# EAGLE board BOARD (EAGLE 8.6.3)
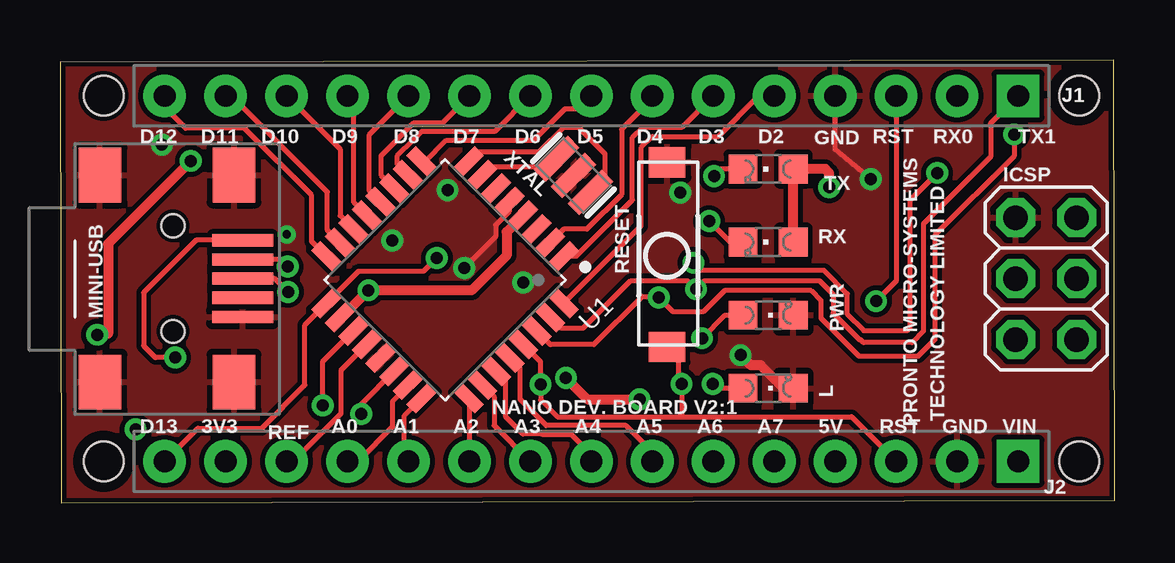
[diagram p0: board, top side]
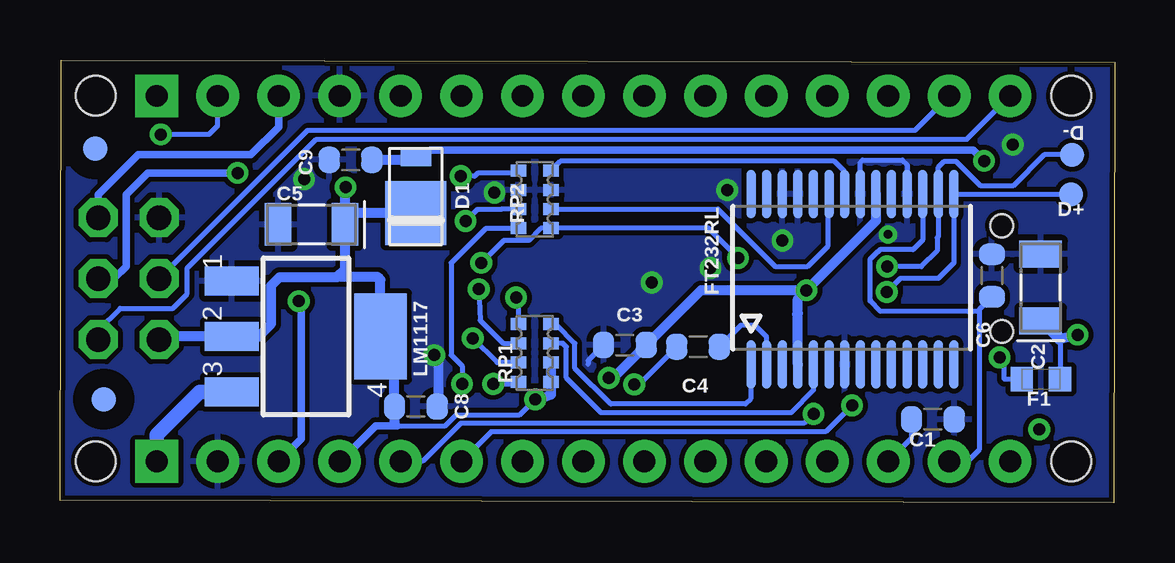
[diagram p1: board, bottom side, seen from below]

Size 43.95 x 18.46 mm. Coordinates in mm from the lower left corner, seen from the top.
Outline: 0.05,0 43.95,0.1 43.9,18.46 0,18.36 0.05,0
Copper layers (1*16): Top 0.035mm / dielectric 1.5mm / Bottom 0.035mm
Design rules "default *": minimum track width 6mil, minimum drill 0.35mm, track to track 6mil, track to pad 6mil, pad to pad 6mil, via to via 6mil, smd to smd 6mil, copper to edge 8mil, drill to drill 8mil, minimum pad ring 12mil, minimum via ring 8mil, stop-mask expansion 0mil, vias tented up to drill 24mil, thermal gap 10mil
Holes 1.65 mm at 1.82,1.72 42.46,16.96 42.46,1.72 1.82,16.96

## Footprints (pad centres in the part's own frame; a part is rotated, then mirrored left to right if it is on the bottom)
C0603-ROUND = smd 0.898 x 1.1: 1 -0.889,0; 2 0.889,0
TAN-A = smd 1.118 x 1.778: 1 0,0; 2 2.794,0
DO220AAL = smd 2.667 x 2.54: P$1 -0.7,0 | smd 0.762 x 1.27: P$2 1.65,0
TP-1.00MM = smd 1 x 1 bottom: X 0,0
0603-1608X90N = smd 0.95 x 1: 1 -0.8,0; 2 0.8,0
SSOP28 = smd 0.381 x 2.032: 1 0,0; 2 0.65,0; 3 1.3,0; 4 1.95,0; 5 2.6,0; 6 3.25,0; 7 3.9,0; 8 4.55,0; 9 5.2,0; 10 5.85,0; 11 6.5,0; 12 7.15,0; 13 7.8,0; 14 8.45,0; 15 8.45,7.112; 16 7.8,7.112; 17 7.15,7.112; 18 6.5,7.112; 19 5.85,7.112; 20 5.2,7.112; 21 4.55,7.112; 22 3.9,7.112; 23 3.25,7.112; 24 2.6,7.112; 25 1.95,7.112; 26 1.3,7.112; 27 0.65,7.112; 28 0,7.112
2X03 = drill 1.016 pad 1.55 octagon: 1 -2.54,-1.27; 2 -2.54,1.27; 3 0,-1.27; 4 0,1.27; 5 2.54,-1.27; 6 2.54,1.27
HEAD15-NOSS = drill 0.914 pad 1.778 square: 1 0,0 | drill 0.914 pad 1.778: 2 2.54,0; 3 5.08,0; 4 7.62,0; 5 10.16,0; 6 12.7,0; 7 15.24,0; 8 17.78,0; 9 20.32,0; 10 22.86,0; 11 25.4,0; 12 27.94,0; 13 30.48,0; 14 33.02,0; 15 35.56,0
CHIPLED_0805 = smd 1.2 x 1.2: A 0,-1.05; C 0,1.05
LINEAR_SOT223 = smd 1.219 x 2.235: 1 -2.311,-3.099; 2 0,-3.099; 3 2.311,-3.099 | smd 3.6 x 2.2: 4 0,3.099
USB-MINI-B_2 = smd 0.508 x 2.54: 1 0,0; 2 0.8,0; 3 1.6,0; 4 2.4,0; 5 3.2,0 | smd 2.286 x 1.778: 6 -2.717,5.948; 7 -2.717,0.36; 8 5.918,0.36; 9 5.918,5.948 | hole 0.95: -0.6,2.9; 3.8,2.9
FD-1-1.5 = smd 1.016 x 1.016: P$1 0,0
CAY16 = smd 0.5 x 0.65: 1 -1.2,-0.675; 2 -0.4,-0.675; 3 0.4,-0.675; 4 1.2,-0.675; 5 1.2,0.675; 6 0.4,0.675; 7 -0.4,0.675; 8 -1.2,0.675
QFP80P900X900X120-32N = smd 1.27 x 0.55: 1 -4.18,2.8; 2 -4.18,2; 3 -4.18,1.2; 4 -4.18,0.4; 5 -4.18,-0.4; 6 -4.18,-1.2; 7 -4.18,-2; 8 -4.18,-2.8; 17 4.18,-2.8; 18 4.18,-2; 19 4.18,-1.2; 20 4.18,-0.4; 21 4.18,0.4; 22 4.18,1.2; 23 4.18,2; 24 4.18,2.8 | smd 0.55 x 1.27: 9 -2.8,-4.18; 10 -2,-4.18; 11 -1.2,-4.18; 12 -0.4,-4.18; 13 0.4,-4.18; 14 1.2,-4.18; 15 2,-4.18; 16 2.8,-4.18; 25 2.8,4.18; 26 2,4.18; 27 1.2,4.18; 28 0.4,4.18; 29 -0.4,4.18; 30 -1.2,4.18; 31 -2,4.18; 32 -2.8,4.18
3*6*4.3_PUSH_SWITCH = smd 1.27 x 1.524: P$1 -3.889,0; P$2 3.81,0
RESONATOR = smd 0.7 x 2: 1 -1,0; 2 0,0; 3 1,0

## Placement (x,y rotation side)
C1  100nF  [C0603-ROUND]  7.58,3.47 0 bottom
C2  4,7uF_16V  [TAN-A]  3.09,7.57 90 bottom
C3  1uF  [C0603-ROUND]  20.41,6.57 180 bottom
C4  100nF  [C0603-ROUND]  17.36,6.5 0 bottom
C5  4,7uF_16V  [TAN-A]  32.07,11.6 180 bottom
C6  100nF  [C0603-ROUND]  5.12,9.47 270 bottom
C8  1uF  [C0603-ROUND]  29.12,4.01 0 bottom
C9  100nF  [C0603-ROUND]  31.84,14.29 180 bottom
D1  SS1P3L  [DO220AAL]  29.12,12.77 90 bottom
D+  DNP  [TP-1.00MM]  1.83,12.86 0 top
D-  DNP  [TP-1.00MM]  1.78,14.5 0 top
F1  MFFSMF050  [0603-1608X90N]  3.08,5.15 180 bottom
FT232RL  FT232RL  [SSOP28]  15.16,5.76 0 bottom
ICSP  [2X03]  41.09,9.34 90 top
J1  XXXX_STRIPNANO  [HEAD15-NOSS]  39.92,16.96 180 top
J2  XXXX_STRIPNANO  [HEAD15-NOSS]  39.92,1.72 180 top
L  Yellow  [CHIPLED_0805]  29.51,4.77 270 top
LM1117  LM1117  [LINEAR_SOT223]  33.7,6.93 270 bottom
MINI-USB  [USB-MINI-B_2]  7.61,7.74 90 top
P0INT_2  DNP  [FD-1-1.5]  42.48,14.75 0 bottom
POINT_1  DNP  [FD-1-1.5]  42.13,4.31 90 bottom
POINT_A  DNP  [FD-1-1.5]  42.43,17 0 top
POINT_B  DNP  [FD-1-1.5]  1.82,1.71 270 top
PWR  Green  [CHIPLED_0805]  29.51,7.82 270 top
RP1  1K  [CAY16]  24.17,6.24 270 bottom
RP2  1K  [CAY16]  24.17,12.64 90 bottom
RX  Red  [CHIPLED_0805]  29.51,10.86 90 top
TX  Green  [CHIPLED_0805]  29.51,13.91 90 top
U1  ATMEGA328PB-U  [QFP80P900X900X120-32N]  16.04,9.29 225 top
U$4  3*6*4.2H260g  [3*6*4.3_PUSH_SWITCH]  25.3,10.3 270 top
XTAL  16MHz  [RESONATOR]  21.4,13.64 135 top

## Library data of the parts
C1 C4 C6 C9 = Condensatori; CASE: 0603; MONTHLY_USAGE: _____; PART_NUMBER: cl10b104kbnc; PRICE: _____; SUPPLIER: _____; TYPE: Condensatori
C2 C5 = Condensatori; CASE: Case_A_(1206); MONTHLY_USAGE: _____; PART_NUMBER: TAJA475MO16RNJ; PRICE: _____; SUPPLIER: _____; TYPE: Condensatori
C3 C8 = Condensatori; CASE: 0603; MONTHLY_USAGE: _____; PART_NUMBER: 1uF_0603/GRM188R61E105KA12D; PRICE: _____; SUPPLIER: _____; TYPE: Condensatori
D1 = Diodi; CASE: SMP; MONTHLY_USAGE: _____; PART_NUMBER: SS1P3L-M3/84A; PRICE: _____; SUPPLIER: _____; TYPE: Diodi
D+ D- P0INT_2 POINT_1 POINT_A POINT_B = Arduino-utility; DATASHEET: DNP; DISTRIBUTOR-LINK: DNP; DISTRIBUTOR-PN: DNP; MANUFACTURER: DNP; MANUFACTURER-PN: DNP
F1 = Arduino-rcl; DATASHEET: http://www.bourns.com/docs/Product-Datasheets/mffsmf.pdf; DISTRIBUTOR-LINK: http://www.digikey.com/product-detail/en/bourns-inc/MF-FSMF050X-2/MF-FSMF050X-2CT-ND/2039389; DISTRIBUTOR-PN: MF-FSMF050X-2CT-ND; MANUFACTURER: Bourns Inc; MANUFACTURER-PN: MF-FSMF050X-2
FT232RL = IntegratedCircuits; CASE: SSOP28; MONTHLY_USAGE: _____; PART_NUMBER: FT232RL; PRICE: _____; SUPPLIER: _____; TYPE: Circuito_Integrato
ICSP = Connettori; MONTHLY_USAGE: _____; PART_NUMBER: PH254-203DF118A00V; PRICE: _____; SUPPLIER: _____; TYPE: Connettori
J1 J2 = Connettori
L = Opto; MONTHLY_USAGE: _____; PART_NUMBER: KPT-2012YC; PRICE: _____; SUPPLIER: _____; TYPE: Opto
LM1117 = IntegratedCircuits; CASE: SOT223; MONTHLY_USAGE: _____; PART_NUMBER: LM1117IMPX-5.0; PRICE: _____; SUPPLIER: _____; TYPE: Circuito_Integrato
MINI-USB = Connettori; MONTHLY_USAGE: _____; PART_NUMBER: 14850; PRICE: _____; SUPPLIER: _____; TYPE: Connettori
PWR TX = Opto; MONTHLY_USAGE: _____; PART_NUMBER: KPT-2012SGC; PRICE: _____; SUPPLIER: _____; TYPE: Opto
RP1 RP2 = Resistenze; CASE: SMD_3,2x1,6; MONTHLY_USAGE: _____; PART_NUMBER: 064R_1K_/_CAY16-102J4LF; PRICE: _____; SUPPLIER: _____; TYPE: Resistenze
RX = Opto; MONTHLY_USAGE: _____; PART_NUMBER: KTP-2012SURCK; PRICE: _____; SUPPLIER: _____; TYPE: Opto
U1 = ATMEGA328PB-U; AVAILABILITY: In Stock; DESCRIPTION: AVR AVR® ATmega, Functional Safety (FuSa) Microcontroller IC 8-Bit 20MHz 32KB (16K x 16) FLASH 32-TQFP (7x7); MF: Microchip Technology; MP: ATMEGA328PB-U; PACKAGE: TQFP-32 Microchip; PRICE: None; PURCHASE-URL: https://www.amazon.ae/Conditioner-Parts-ATMEGA328PB-AU-ATMEGA328PB-U-microcontroller/dp/B094R2HX55
U$4 = 364.3H260g push switch
XTAL = Cristalli; MONTHLY_USAGE: _____; PART_NUMBER: CSTCE16M0V53-R0; PRICE: _____; SUPPLIER: _____; TYPE: Cristalli

## Nets
3V3: C6.2 FT232RL.17 J2.14
+5V: C3.1 C5.1 C8.1 D1.P$1 FT232RL.4 FT232RL.20 ICSP.2 J2.4 LM1117.2 LM1117.4 RP1.5 RP1.6 RX.A TX.A U1.4 U1.18
A0: J2.12 U1.23
A1: J2.11 U1.24
A2: J2.10 U1.25
A3: J2.9 U1.26
A4: J2.8 U1.27
A5: J2.7 U1.28
A6/PE2: J2.6 U1.19
A7/PE3: J2.5 U1.22
AREF: C1.1 J2.13 U1.20
COM: C1.2 C2.2 C3.2 C5.2 C6.1 C8.2 C9.2 FT232RL.7 FT232RL.18 FT232RL.21 FT232RL.25 FT232RL.26 ICSP.6 J1.4 J2.2 L.C LM1117.1 MINI-USB.1 MINI-USB.6 MINI-USB.7 MINI-USB.8 MINI-USB.9 PWR.C RP2.3 RP2.6 U1.5 U1.21 U$4.P$1 XTAL.2
D0/RX: J1.2 RP1.1 U1.30
D1/TX: J1.1 RP1.2 U1.31
D2: J1.5 U1.32
D3: J1.6 U1.1
D4: J1.7 U1.2
D5: J1.8 U1.9
D6: J1.9 U1.10
D7: J1.10 U1.11
D8: J1.11 U1.12
D9: J1.12 U1.13
D10: J1.13 U1.14
D11/MOSI: ICSP.4 J1.14 U1.15
D12/MISO: ICSP.1 J1.15 U1.16
D13/SCK: ICSP.3 J2.15 RP2.1 U1.17
N$1: U1.7 XTAL.3
N$2: U1.8 XTAL.1
N$3: PWR.A RP1.3
N$4: C4.2 FT232RL.2
N$5: D+.X FT232RL.15 MINI-USB.3
N$6: D-.X FT232RL.16 MINI-USB.4
N$7: L.A RP2.8
N$8: FT232RL.23 RP2.2
N$9: FT232RL.22 RP2.4
N$11: RP2.5 TX.C
N$26: F1.2 MINI-USB.5
N$29: RP2.7 RX.C
PE0: U1.3
PE1: U1.6
RESET: C4.1 ICSP.5 J1.3 J2.3 RP1.4 U1.29 U$4.P$2
RX: FT232RL.1 RP1.8
TX: FT232RL.5 RP1.7
VIN: J2.1 LM1117.3
VUSB: C2.1 C9.1 D1.P$2 F1.1

## Tracks (layer width: path | path; a pad name or v marks a point on that pad's centre or on a via)
3V3
  Bottom 0.203: C6.2 5.65,8.05 | J2.14 6.13,1.72 5.65,2.2 5.65,8.05 | FT232RL.17 8.01,10.94 8.4,10.55 9.78,10.55 9.88,10.45 9.9,10.45 10.21,10.14 10.21,8.49 10.2,8.48 10.2,8.4 9.8,8 5.7,8 5.65,8.05
+5V  (via drill 0.5)
  Top 0.406: v32.05,13.15 32.05,13.75 31.89,13.91 TX.A RX.A | U1.18 11.75,7.75 v12.85,8.85 17.15,8.85 18.61,10.31 18.61,11.29 U1.4 | v21.08,5.2 21.98,4.31 v24.15,4.31
  Bottom 0.203: 32.27,1.72 J2.4 | 29.89,3.2 27.89,3.2 27.43,3.66 24.8,3.66 24.28,4.18
  Bottom 0.305: 32.27,1.72 30.79,3.2 29.89,3.2 30.01,3.32
  Bottom 0.406: 30.01,3.32 C8.1 30.01,6.34 LM1117.4 30.6,9.3 30.7,9.4 32.4,9.4 | D1.P$1 31.6,12.07 C5.1 | C5.1 32.07,13.13 v32.05,13.15 | FT232RL.20 9.96,11.74 v12.85,8.85 | FT232RL.4 13.21,7.9 | 13.21,7.9 13.21,8.49 v12.85,8.85 | v12.85,8.85 17.25,8.85 C3.1 20.89,5.2 v21.08,5.2 | 32.4,9.4 34.8,9.4 35.15,9.05 35.15,7.45 35.67,6.93 LM1117.2 39.69,6.93 ICSP.2 | C5.1 32.07,9.73 32.4,9.4 | v24.15,4.31 24.28,4.18 23.5,4.5 RP1.5 RP1.6 | 13.25,7.86 13.21,7.9
A0
  Top 0.203: U1.23 14.5,4.85 13.85,4.2 13.85,3.15 12.42,1.72 J2.12
A1
  Top 0.203: J2.11 14.35,1.89 14.35,3.64 U1.24
A2
  Top 0.203: U1.25 17.06,4.31 J2.10
A3
  Top 0.203: J2.9 19.58,1.72 18.09,3.21 18.09,4.42 U1.26
A4
  Top 0.203: J2.8 22.14,2.01 21.3,2.85 20.09,2.85 20.07,2.86 19.29,2.86 18.57,3.58 18.57,5.07 U1.27
A5
  Top 0.203: J2.7 24.68,2.12 23.58,3.22 20.26,3.22 19.17,4.3 19.17,5.6 U1.28
A6/PE2  (via drill 0.5)
  Top 0.203: v10.95,4.05 10.95,5.89 U1.19
  Bottom 0.203: J2.6 25.99,2.95 12.05,2.95 v10.95,4.05
A7/PE3  (via drill 0.5)
  Top 0.203: U1.22 12.55,4.1 v12.55,3.7
  Bottom 0.203: J2.5 28.84,1.72 27.25,3.31 12.94,3.31 v12.55,3.7
AREF
  Top 0.203: U1.20 11.7,5.51 11.7,3.7 9.72,1.72 J2.13
  Bottom 0.203: C1.1 8.47,2.69 J2.13
COM  (via drill 0.35, 0.5)
  Top 0.203: v33.78,13.49 32.3,14.72 J1.4 | 21.35,13.53 21.35,13.59 XTAL.2 | U1.5 18.72,12.14 18.15,11.58 18.15,11.09 v16.85,9.78
  Top 0.406: v28.36,6.15 28.78,5.72 29.2,5.72 30.16,4.77 L.C
  Bottom 0.203: RP2.6 25.04,12.85 | C3.2 21.95,5.93 21.95,5.78 | FT232RL.18 8.66,14.09 8.85,14.29 10.51,14.29 10.61,14.19 FT232RL.21
  Bottom 0.406: v28.36,6.15 28.31,6.1 28.2,6.1 28.2,4.04 C8.2
  other vias: 19.3,9.18 9.45,11.18 13.85,10.93 4.25,14.93 25.85,12.93 16.15,13.03
  pour Top (isolate 0.203): -0.05,18.4 45.1,18.4 45.1,0 0,0 -0.05,0
  pour Bottom (isolate 0.203): -0.05,18.4 45.05,18.4 45.05,0.05 -0.05,0.05
D0/RX  (via drill 0.5)
  Top 0.203: U1.30 20.44,6.59 22.24,6.59 24.25,8.6 24.9,8.6 v24.95,8.55 25.55,7.95 26.8,7.95 27.69,8.84 31.29,8.84 31.71,8.43 31.71,7.69 33.29,6.11 35.76,6.11 36.45,6.8 36.45,11.15 39.75,14.45 v39.75,15.35
  Bottom 0.203: v24.95,8.55 24.85,8.45 RP1.1 | J1.2 37.38,15.72 37.75,15.35 v39.75,15.35
D1/TX  (via drill 0.5)
  Top 0.203: U1.31 20.89,7.28 21.8,7.28 23.78,9.26 26.14,9.26 v26.5,8.9 26.86,9.26 31.64,9.26 32.21,8.69 32.21,7.89 33.3,6.8 33.35,6.8 33.47,6.67 35.5,6.67 35.97,7.15 35.97,11.62 38.78,14.42 38.78,15.82 J1.1
  Bottom 0.203: v26.5,8.9 26.45,7.6 25.49,6.64 RP1.2
D2
  Top 0.203: J1.5 29.12,16.96 27.43,15.27 24.68,15.27 24.2,14.8 24.2,11.54 U1.32
D3
  Top 0.203: U1.1 21.49,10.26 23.85,12.62 23.85,15.23 24.28,15.66 25.92,15.66 J1.6
D4
  Top 0.203: J1.7 24.68,16.85 23.4,15.57 23.4,12.85 21.95,11.4 20.98,11.4 U1.2
D5
  Top 0.203: J1.8 21.61,16.43 21.05,16.43 19.75,15.12 17.17,15.12 17.15,15.11 16.1,15.11 15.22,14.22 U1.9
D6
  Top 0.203: J1.9 18.12,15.48 17.02,15.48 17,15.46 15.05,15.46 14.71,15.12 14.03,14.45 14.03,14.13 U1.10
D7
  Top 0.203: U1.11 13.37,13.66 13.37,14.46 14.73,15.82 15.92,15.82 J1.10
D8
  Top 0.203: U1.12 12.87,13.02 12.87,15.31 J1.11
D9
  Top 0.203: J1.12 11.98,16.93 12.25,16.66 12.25,12.52 U1.13
D10
  Top 0.203: U1.14 11.67,11.97 11.67,14.73 J1.13
D11/MOSI
  Top 0.203: U1.15 11.14,11.36 11.14,12.95 7.13,16.96 J1.14
  Bottom 0.203: ICSP.4 33.63,15.53 8.32,15.53 J1.14
D12/MISO
  Top 0.203: J1.15 4.36,16.49 5.24,15.61 5.25,15.62 7.7,15.62 7.7,15.6 10.49,12.81 10.49,10.89 U1.16
  Bottom 0.203: ICSP.1 42.36,7.19 41.45,8.1 39.25,8.1 38.65,8.7 38.65,9.77 33.27,15.15 6.17,15.15 J1.15
D13/SCK  (via drill 0.5)
  Top 0.203: v15.7,10.2 15.15,9.65 12.45,9.65 U1.17 10.2,7.41 10.2,4.9 8.4,3.1 5.74,3.1 J2.15 | v36.55,13.75 35.42,12.62 35.42,7.3 35.3,7.17 33.49,7.17 32.81,7.85 32.81,8.7 31.83,9.68 26.71,9.68 v26.39,10
  Bottom 0.203: v26.39,10 25.46,10.94 24.42,10.94 23.91,11.44 RP2.1 23.25,11.44 23.24,11.45 16.95,11.45 v15.7,10.2
  Bottom 0.305: ICSP.3 41.71,9.34 41.2,9.85 41.2,12.85 40.3,13.75 v36.55,13.75
N$1
  Top 0.203: XTAL.3 20.33,13.99 17.92,13.99 U1.7
N$2
  Top 0.203: U1.8 17.42,14.63 19.95,14.63 20.99,15.66 21.59,15.66 22.71,14.54 22.71,13.54 XTAL.1
N$3  (via drill 0.5)
  Top 0.203: v26.75,6.85 27.72,7.82 PWR.A
  Bottom 0.203: RP1.3 25.74,5.84 v26.75,6.85
N$4
  Bottom 0.203: FT232RL.2 14.51,6.9 15.01,7.4 15.57,7.4 C4.2
N$5  (via drill 0.5)
  Top 0.203: v9.5,8.78 8.94,9.34 MINI-USB.3
  Bottom 0.203: v9.5,8.78 8.93,9.35 7.35,9.35 6.71,9.99 FT232RL.15 1.98,12.87 1.91,12.94 D+.X
N$6  (via drill 0.5)
  Top 0.203: v9.49,9.84 9.19,10.14 MINI-USB.4
  Bottom 0.203: v9.49,9.84 8.06,9.84 7.4,10.5 7.4,11.05 7.35,11.09 FT232RL.16 7.35,13.98 7.1,14.24 6.62,14.24 6.53,14.14 6.52,14.14 5.61,13.23 4.22,13.23 2.94,14.5 D-.X
N$7  (via drill 0.5)
  Top 0.203: L.A 27.48,4.77 v27.2,4.95
  Bottom 0.2: 27.65,6.15 27.2,5.7 v27.2,4.95
  Bottom 0.203: RP2.8 26.2,11.44 27.65,9.99 27.65,6.15
N$8
  Bottom 0.203: FT232RL.23 11.91,12.8 11.95,12.75 11.95,10.7 12.8,9.85 14.15,9.85 16.54,12.24 RP2.2
N$9
  Bottom 0.203: RP2.4 23.1,14.24 11.7,14.24 11.26,13.79 FT232RL.22
N$11  (via drill 0.5)
  Top 0.203: v27.25,13.61 27.2,13.64 27.47,13.91 TX.C
  Bottom 0.203: RP2.5 24.96,13.73 26.55,13.73 26.67,13.61 v27.25,13.61
N$12  (via drill 0.5)
  other vias: 3.15,3.05
N$26  (via drill 0.5)
  Top 0.203: v4.8,6.05 3.97,6.05 3.49,6.54 3.49,8.75 5.67,10.94 MINI-USB.5
  Bottom 0.203: F1.2 4.6,5.15 4.6,5.85 v4.8,6.05
N$29  (via drill 0.5)
  Top 0.203: RX.C 27.92,10.86 v27.05,11.74
  Bottom 0.203: RP2.7 25.54,12.24 25.55,12.22 26.56,12.22 v27.05,11.74
RESET  (via drill 0.5)
  Top 0.2: U1.29 19.47,6.42
  Top 0.203: 25.8,3.57 20.73,3.57 20.02,4.28 v20.02,4.92 20.02,5.88 19.47,6.42 | 25.8,3.57 32.99,3.57 J2.3 | 25.75,6.68 25.75,6.45 | 25.75,6.45 25.75,4.95 25.9,4.8 | v25.9,4.95 25.9,4.8 | 25.9,4.8 25.9,3.67 25.8,3.57 | U$4.P$2 25.66,6.54 25.75,6.45 | v34,8.4 34.84,9.24 J1.3
  Bottom 0.2: C4.1 19.82,4.92 v20.02,4.92
  Bottom 0.203: 42.35,12.85 42.36,12.84 | v25.9,4.95 25.87,4.92 24.97,4.92 RP1.4
  Bottom 0.305: J2.3 33.9,2.66 33.9,8.3 v34,8.4 | J1.3 34.84,15.66 35.99,14.51 40.69,14.51 42.35,12.85 | 42.36,12.84 ICSP.5
RX
  Bottom 0.203: RP1.8 23.46,7.4 23.26,7.4 22.5,6.64 22.5,5.6 21,4.11 15.39,4.11 15.16,4.34 FT232RL.1
TX
  Bottom 0.203: RP1.7 23,6.64 22.85,6.5 22.85,5.2 21.4,3.75 13.5,3.75 12.56,4.7 FT232RL.5
VIN
  Bottom 0.61: LM1117.3 38.13,4.62 39.92,2.83 J2.1
VUSB  (via drill 0.5)
  Top 0.406: v1.55,7 2,7.05 2,10.8 v5.45,14.25
  Bottom 0.203: C2.1 2.28,6.76 F1.1
  Bottom 0.305: 28.8,14.42 28.52,14.7 23.2,14.7 19.95,14.7 5.9,14.7 v5.45,14.25
  Bottom 0.406: D1.P$2 28.8,14.42 28.93,14.29 C9.1 | v1.55,7 2.32,6.8 C2.1

## Text on the board
tPlace: D12 | D11 | D10 | D9 | D8 | D7 | D6 | D5 | D4 | D3 | D2 | RST | RX0 | TX1 | GND | PRONTO MICRO-SYSTEMS | TECHNOLOGY LIMITED | RESET | NANO DEV. BOARD V2:1 | D13 | 3V3 | REF | A0 | A1 | A2 | A3 | A4 | A5 | A6 | A7 | 5V | RST | GND | VIN